# Altium PCB CurlingStonePCB.PcbDoc
Units mm, origin at the board's own origin, x right, y up, seen from the top; angles counter-clockwise.
Board outline 85 x 85 mm, 4 copper layers (Top Layer, Mid Layer 1, Mid Layer 2, Bottom Layer), stack 1.583 mm thick; 57 components, 76 nets, 239 pads, 232 vias.
Unrouted connection lines stored in the file: 1.
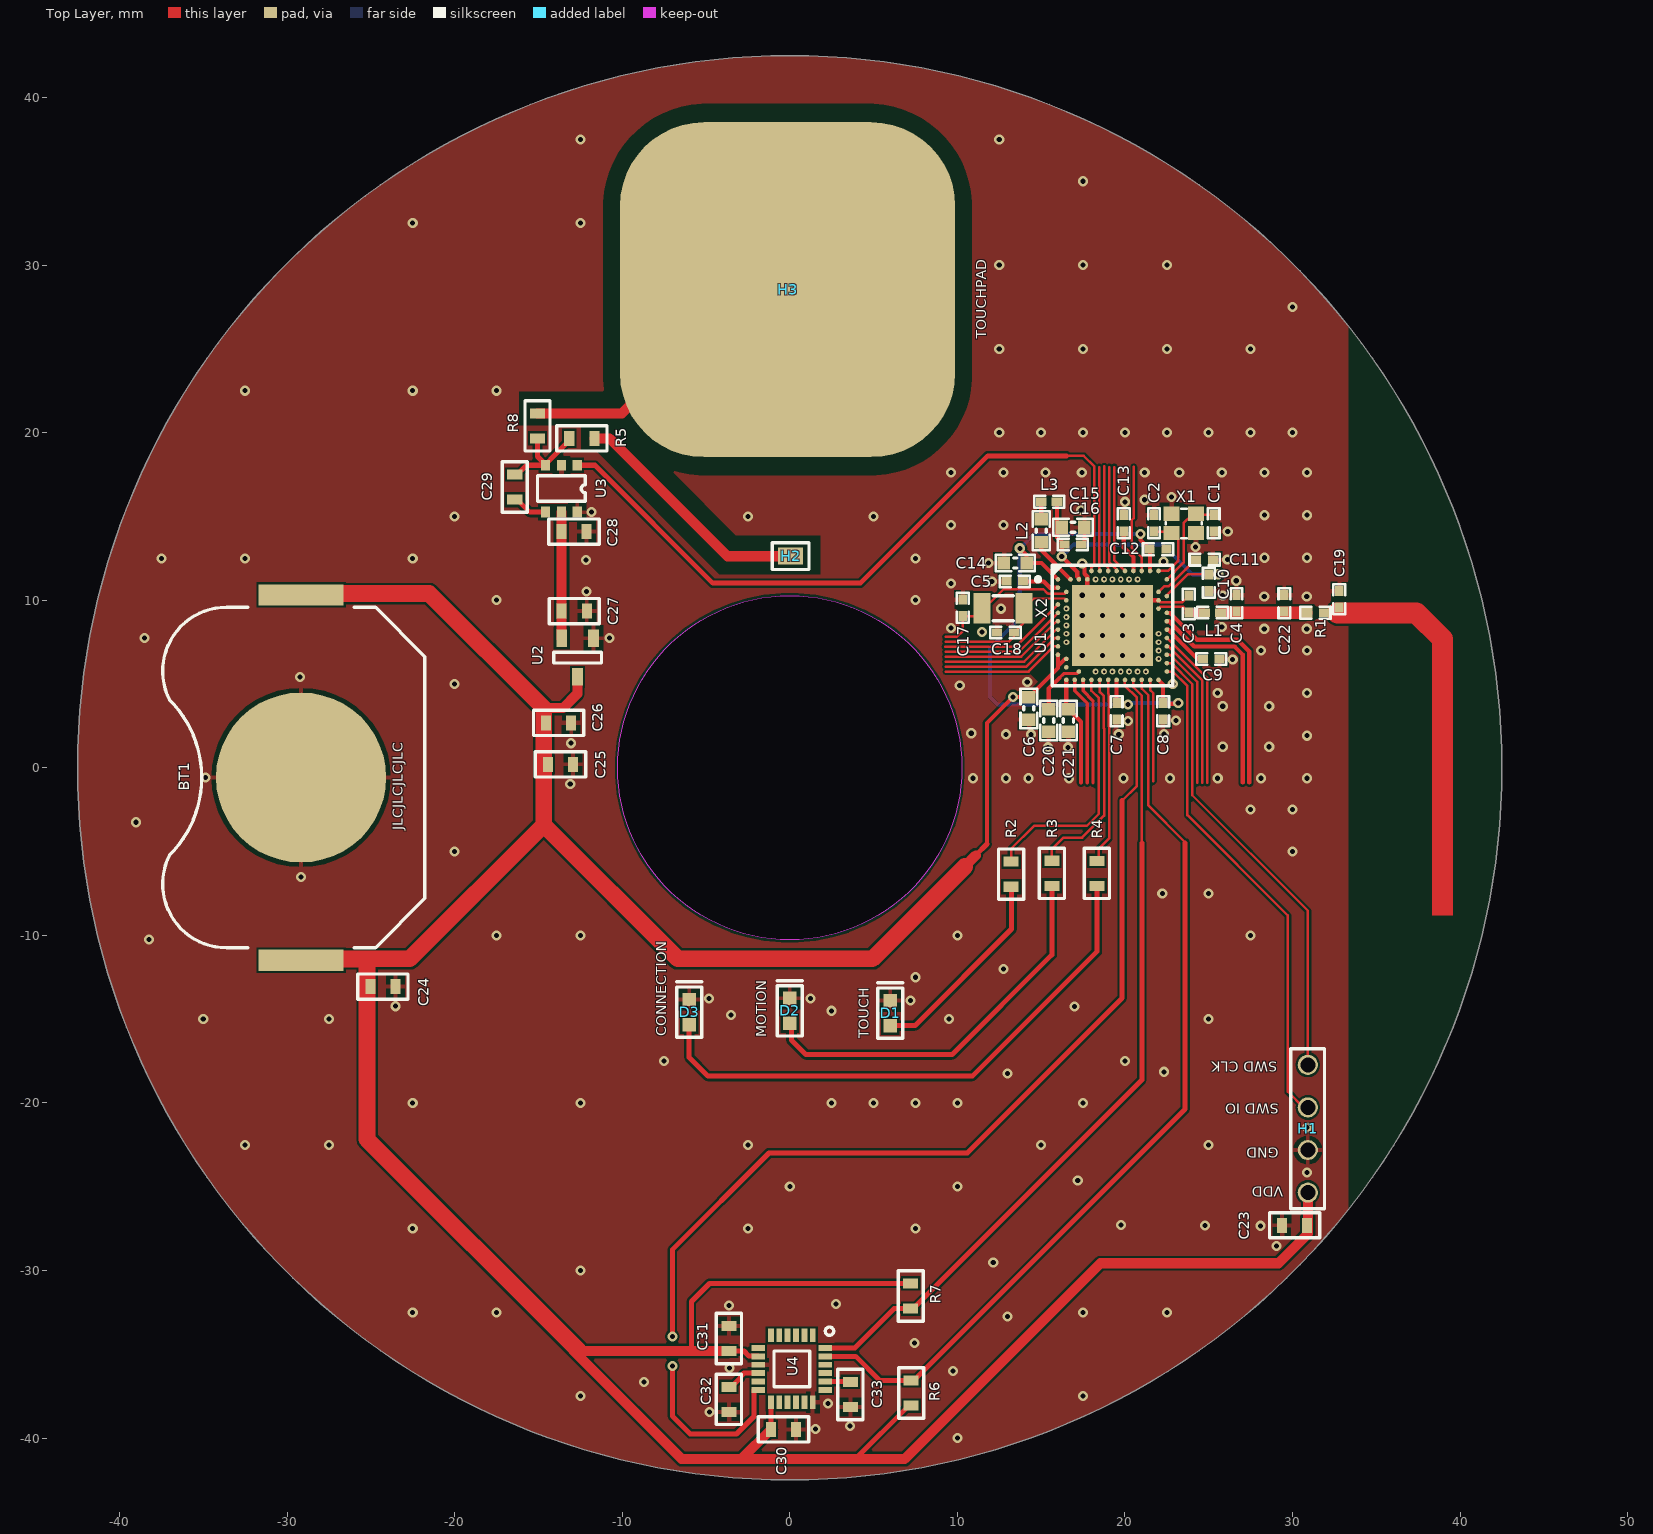
[diagram p0: Top Layer view]
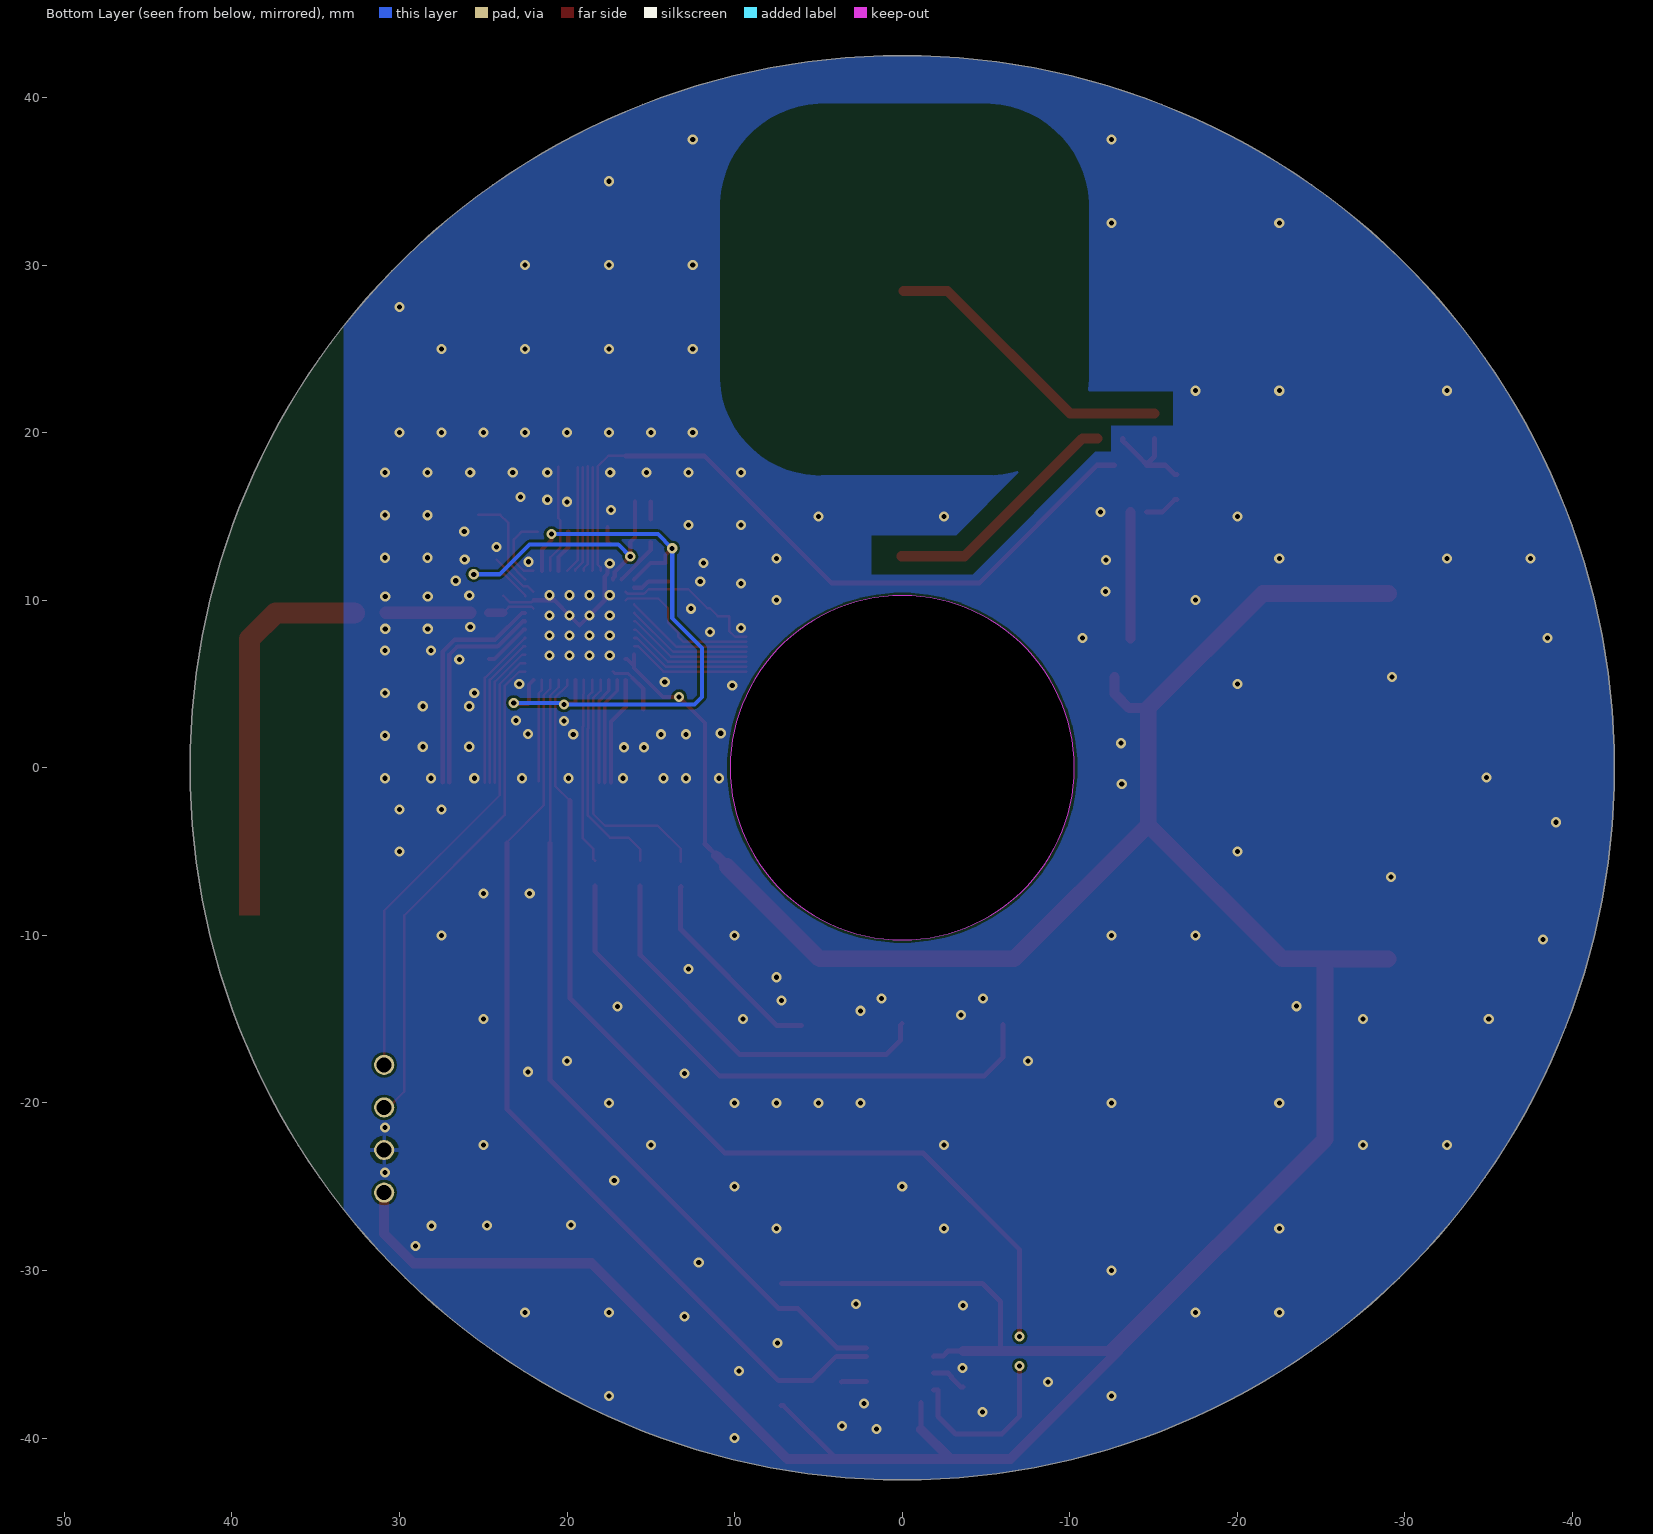
[diagram p1: Bottom Layer view, seen from below]
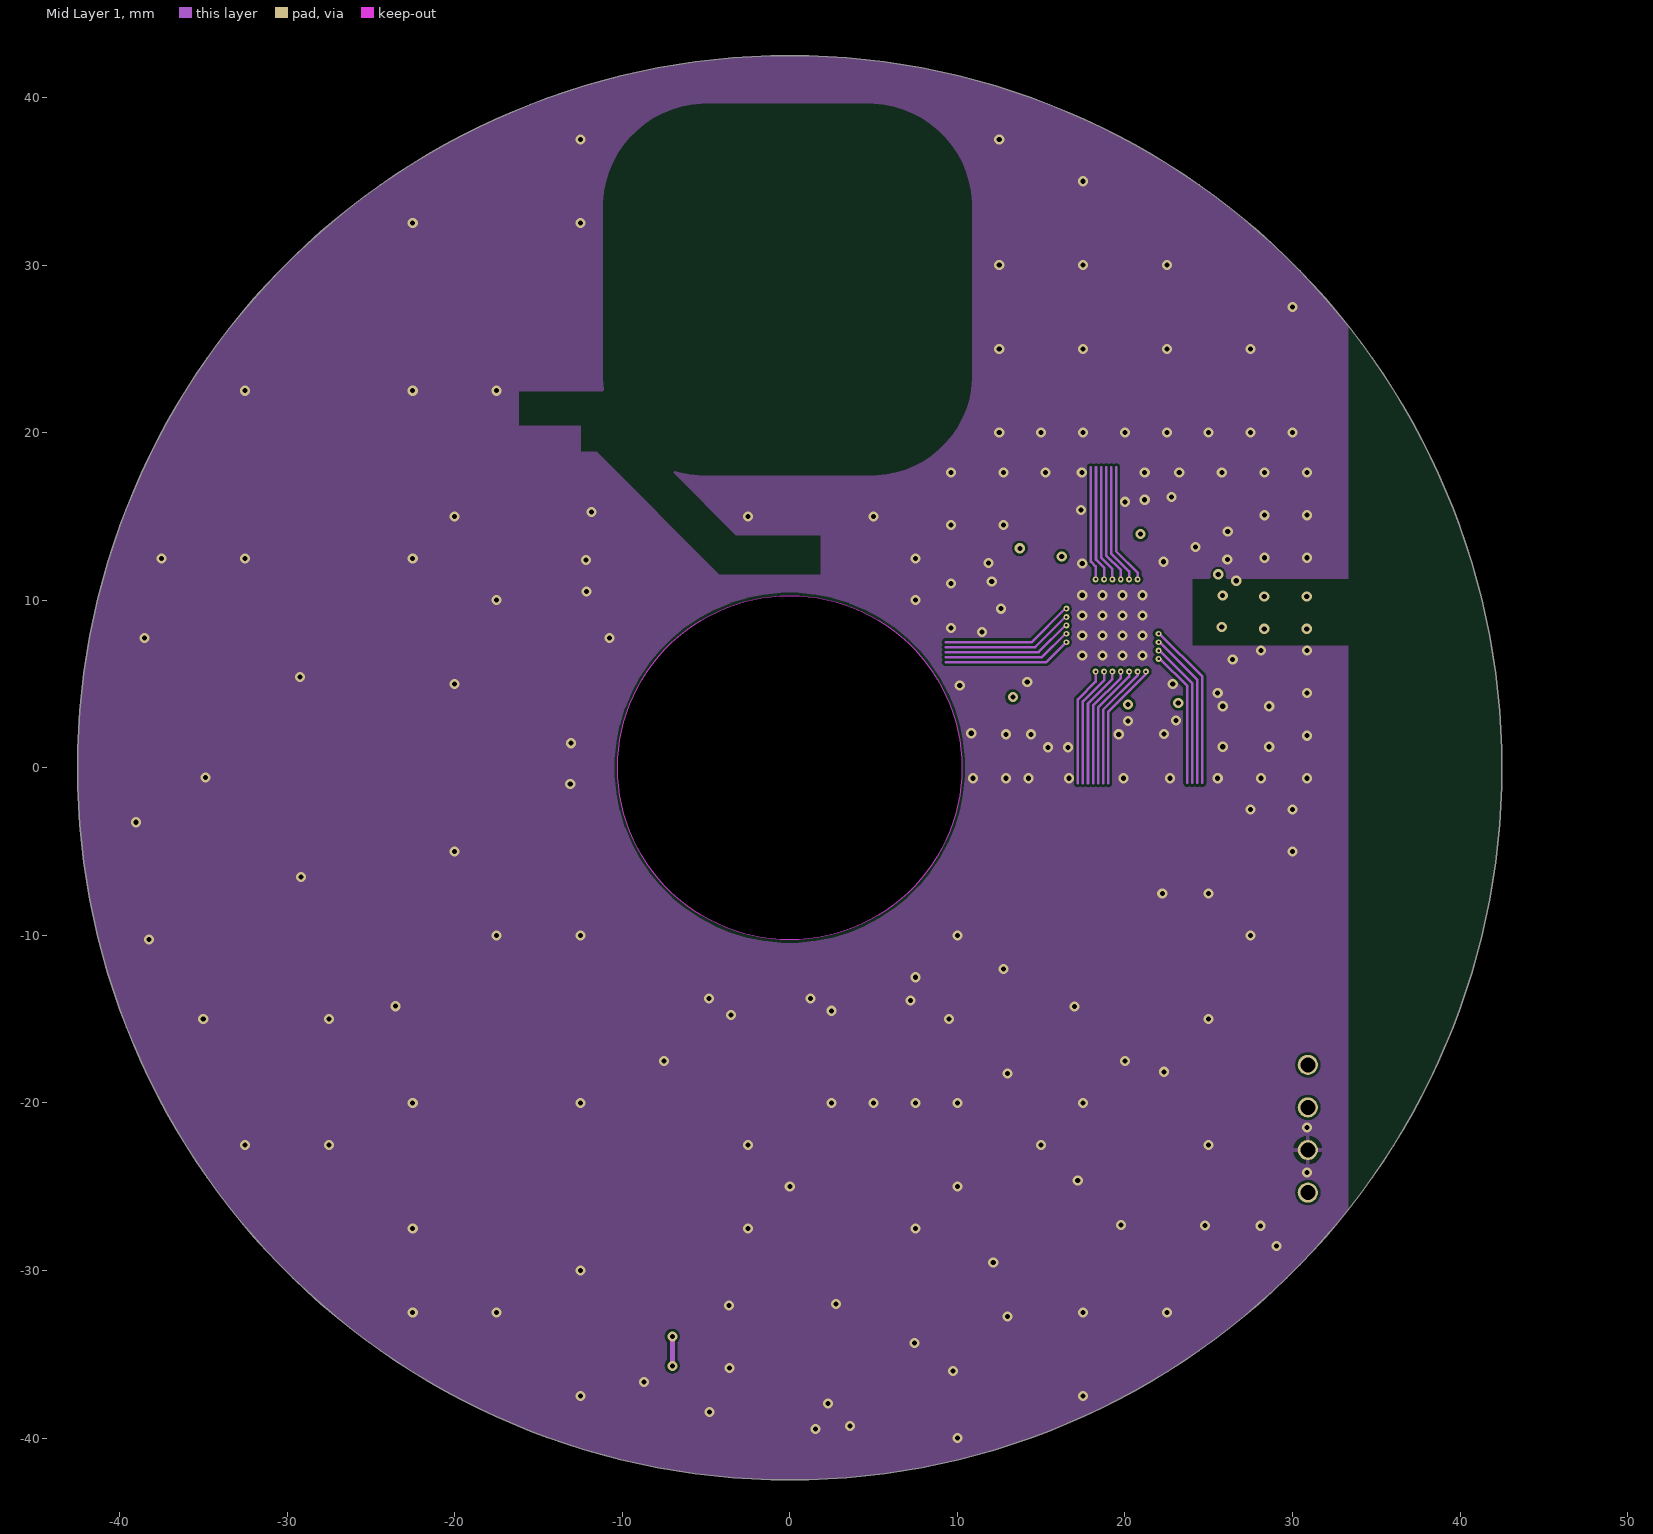
[diagram p2: Mid Layer 1]
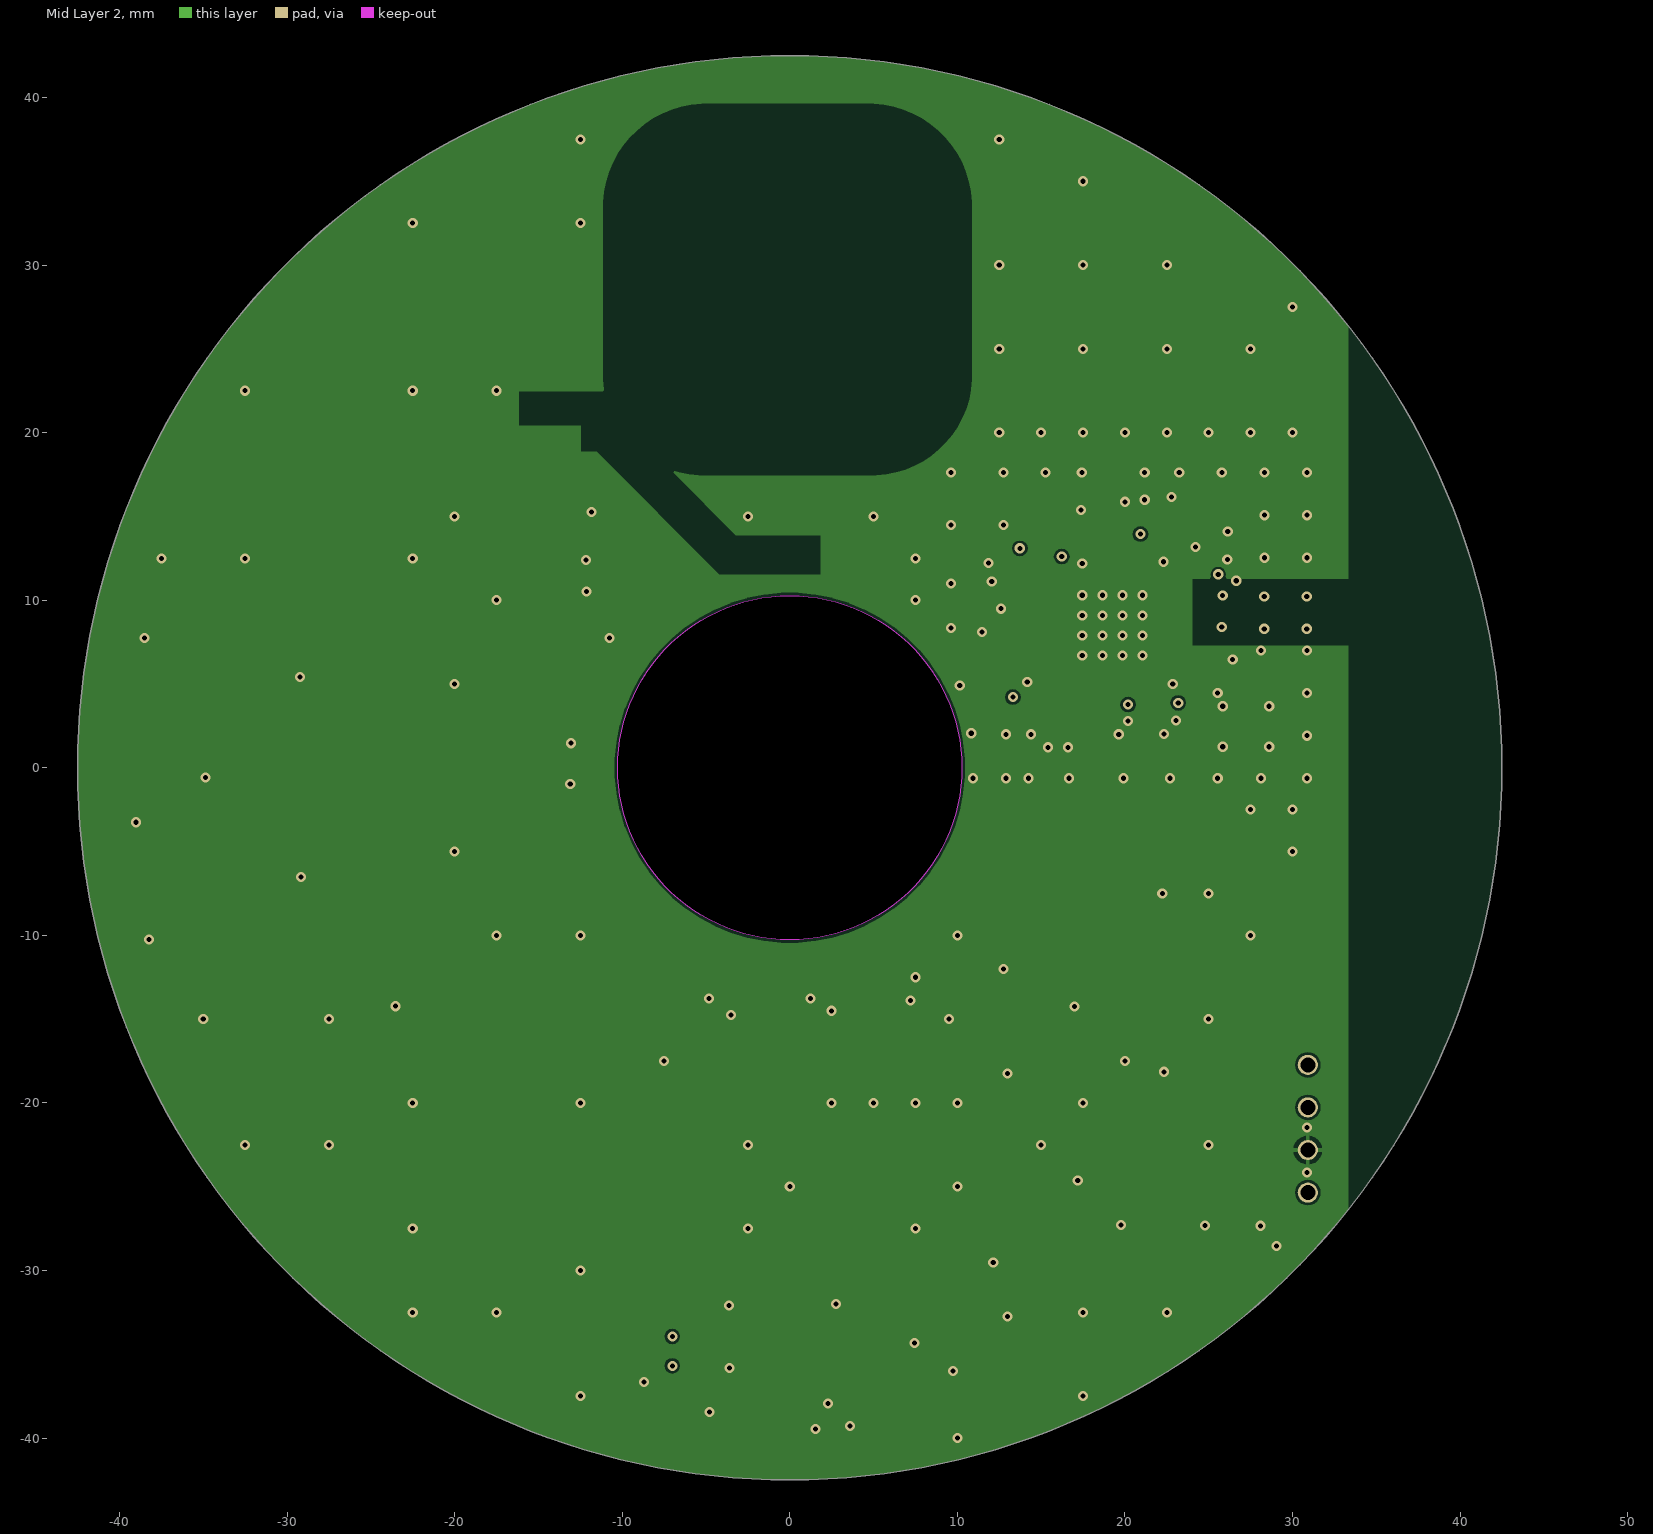
[diagram p3: Mid Layer 2]
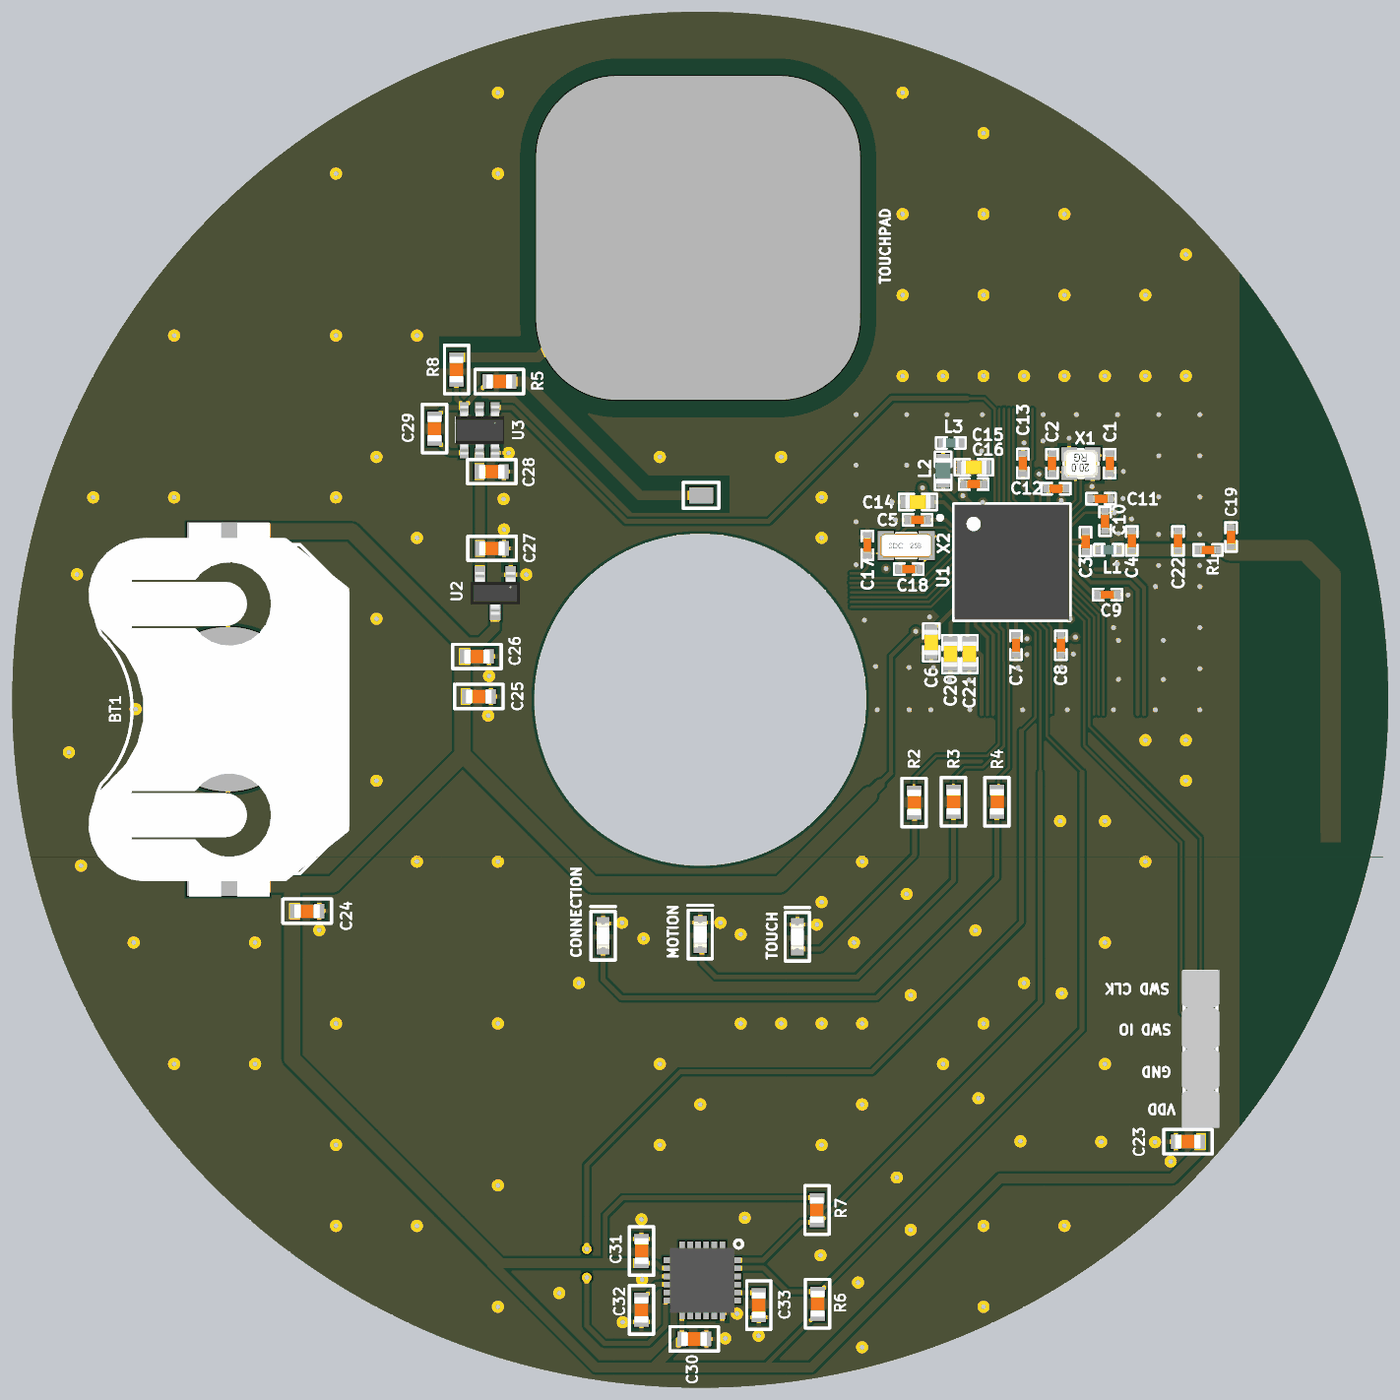
[diagram p4: 3D render of the assembled board from above, using the file's embedded part models]

## Layer stack, top to bottom
Top Solder: solder mask 0.0102, Solder Resist, Dk 3.5
Top Layer: signal copper 0.0356
Dielectric1: core 0.07, FR-4, Dk 4.8
Mid Layer 1: signal copper 0.036
Dielectric 3: prepreg 1.3, Dk 4.2
Mid Layer 2: signal copper 0.036
Dielectric 2: core 0.07, Dk 4.2
Bottom Layer: signal copper 0.0356
Bottom Solder: solder mask 0.0102, Solder Resist, Dk 3.5

## Board outline
0,-42.5 cw(c0,0) -42.5,0 cw(c0,0) 0,42.5 cw(c0,0) 42.5,0 cw(c0,0)
cut-out: 0,-10.269 cw(c0,0) -10.269,0 cw(c0,0) 0,10.269 cw(c0,0) 10.269,0 cw(c0,0)

## Design rules (kind name [scope] priority, off if disabled: settings)
Clearance Polygon_ANT [(InNamedPolygon('Top_Layer-GND')) or  (InNamedPolygon('Mid_Layer_1-GND')) or (InNamedPolygon('Mid_Layer_2-GND')) or (InNamedPolygon('Bottom_Layer-GND')) vs InNet('RF')] p1: gap=0.254 ignorepadtopadclearanceinfootprint=FALSE
Clearance Polygon [(InNamedPolygon('Top_Layer-GND')) or  (InNamedPolygon('Mid_Layer_1-GND')) or (InNamedPolygon('Mid_Layer_2-GND')) or (InNamedPolygon('Bottom_Layer-GND'))] p2: gap=0.254 ignorepadtopadclearanceinfootprint=FALSE except(0: Arc-Hole Track-Hole SMDPad-Hole THPad-Hole Via-Hole Fill-Hole Poly-Hole Region-Hole Text-Hole)
Clearance Clearance_Top [OnLayer('Top Layer')] p3: gap=0.145 ignorepadtopadclearanceinfootprint=FALSE except(0: Arc-Hole Track-Hole SMDPad-Hole THPad-Hole Via-Hole Fill-Hole Poly-Hole Region-Hole Text-Hole)
Clearance [All] p4: gap=0.15 ignorepadtopadclearanceinfootprint=FALSE
ComponentClearance [All] p1 off: gap=0.254 collisioncheckmode=3 verticalgap=0.254 showdistances=FALSE
FabricationTestPointUsage TestPointUsage [All] p1: valid=0 allowmultiple=FALSE
FabricationTestpoint Testpoint [All] p1: side=3 testpointundercomponent=TRUE minsize=1.016 maxsize=2.54 preferedsize=1.524 minholesize=0 maxholesize=1.016 preferedholesize=0.813 testpointgrid=0.025 allowsidetop=TRUE allowsidebottom=TRUE usegrid=TRUE gridtolerance=0
Height [All] p1 off: minheight=0 maxheight=25.4 prefheight=12.7
HoleSize [All] p1: absolutevalues=TRUE maxlimit=4.064 minlimit=0.1 maxpercent=80.000 minpercent=20.000
MinimumAnnularRing [All] p1 off: minimumring=0.152
PolygonConnect PolygonConnect_1 [isVia and innet(gnd)] p1: connectstyle=Direct reliefconductorwidth=0.254 reliefentries=4 polygonreliefangle="90 Angle" airgapwidth=0.254
PolygonConnect [All] p2: connectstyle=Relief reliefconductorwidth=0.254 reliefentries=4 polygonreliefangle="90 Angle" airgapwidth=0.254
RoutingVias [All] p1: holewidth=0.305 width=0.61 viastyle="Through Hole" minholewidth=0.1 minwidth=0.3 maxholewidth=0.305 maxwidth=0.61
SilkToSolderMaskClearance SilkscreenOverComponentPads [IsPad] p1: minsilkscreentomaskgap=0.254 clearancetoexposedcopper=TRUE
SolderMaskExpansion [All] p1: expansion=0.076 istentingtop=FALSE
Width [All] p1: maxlimit=2 minlimit=0.145 preferedwidth=0.15 minimp=50.000000 maximp=50.000000 favimp=50.000000
24 further rules are at their usual default settings.

## Classes and differential pairs
component class CurlingStoneSchematic: BT1 C24 C26 C28 C31 C33 D1 D2 D3 H1 H2 H3 R2 R3 R4 R5 R6 R7 R8 U2 U3 U4
component class nrf52840_qiaa: C1 C2 C3 C4 C5 C6 C7 C8 C9 C10 C11 C12 C13 C14 C15 C16 C17 C18 C19 C20 C21 C22 L1 L2 L3 R1 U1 X1 X2

## Components (designator, comment, footprint, x,y, rotation, side; value= is the part's Value field where it differs from the comment)
BT1 "Battery Holder" "Battery Holder" -29.165,-0.581 r90 top
C1 "12pF" CAPC1005X04L 25.293,14.59 r270 top
C2 "12pF" CAPC1005X04L 21.737,14.59 r90 top
C3 "0.8pF" CAPC1005X04L 23.805,9.77 r270 top
C4 "0.5pF" CAPC1005X04L 26.66,9.815 r270 top
C5 "100nF" CAPC1005X04L 13.428,11.119 r180 top
C6 "4.7µF" CAPC1608X06L 14.268,3.544 r270 top
C7 "100nF" CAPC1005X04L 19.503,3.369 r270 top
C8 "100nF" CAPC1005X04L 22.278,3.369 r270 top
C9 "820pF" CAPC1005X04L 25.153,6.494 r0 top
C10 "N.C." CAPC1005X04L 25.009,11.034 r90 top
C11 "100pF" CAPC1005X04L 24.753,12.419 r0 top
C12 "100nF" CAPC1005X04L 21.978,13.044 r0 top
C13 "N.C." CAPC1005X04L 19.928,14.594 r90 top
C14 "1.0µF" CAPC1608X06L 13.453,12.219 r180 top
C15 "1.0µF" CAPC1608X06L 16.903,14.358 r180 top
C16 "47nF" CAPC1005X04L 16.891,13.32 r0 top
C17 "12pF" CAPC1005X04L 10.326,9.544 r90 top
C18 "12pF" CAPC1005X04L 12.876,8.069 r180 top
C19 "0603 Capacitor" RF_0603 32.788,10.053 r270 top
C20 "4.7µF" CAPC1608X06L 15.453,2.819 r270 top
C21 "4.7µF" CAPC1608X06L 16.628,2.819 r270 top
C22 "N.C." CAPC1005X04L 29.512,9.815 r90 top
C23 "0603 Capacitor" 0603 30.124,-27.305 r0 top
C24 "0603 Capacitor" 0603 -24.282,-13.056 r180 top
C25 "0603 Capacitor" 0603 -13.679,0.203 r180 top
C26 "0603 Capacitor" 0603 -13.792,2.673 r180 top
C27 "0603 Capacitor" 0603 -12.86,9.353 r180 top
C28 "0603 Capacitor" 0603 -12.88,14.097 r180 top
C29 "0603 Capacitor" 0603 -16.41,16.753 r90 top
C30 "0603 Capacitor" 0603 -0.375,-39.482 r180 top
C31 "0603 Capacitor" 0603 -3.63,-34.055 r270 top
C32 "0603 Capacitor" 0603 -3.63,-37.691 r90 top
C33 "0603 Capacitor" 0603 3.62,-37.399 r90 top
D1 "0603 LED" "0603 LED" 6,-14.641 r90 top
D2 "0603 LED" "0603 LED" 0,-14.503 r90 top
D3 "0603 LED" "0603 LED" -6,-14.58 r90 top
H1 "4x1 Header" "4x1 HEADER TH" 30.912,-25.349 r90 top
H2 "Electrode" "ELECTRODE EXTERNAL" 0.051,12.631 r90 top
H3 "Electrode" "ELECTRODE INTERNAL" -0.08,28.453 r0 top
L1 "4.7nH" INDC1005X04L 25.227,9.262 r0 top
L2 "10µH" INDC1608X06L 15.003,14.144 r270 top
L3 "15nH" INDC1005X04L 15.478,15.869 r180 top
R1 "0603 Resistor" RF_0603 31.368,9.253 r0 top
R2 "0603 Resistor" 0603 13.208,-6.35 r270 top
R3 "0603 Resistor" 0603 15.642,-6.299 r270 top
R4 "0603 Resistor" 0603 18.325,-6.302 r270 top
R5 "0603 Resistor" 0603 -12.41,19.653 r0 top
R6 "0603 Resistor" 0603 7.246,-37.313 r270 top
R7 "0603 Resistor" 0603 7.214,-31.521 r90 top
R8 "0603 Resistor" 0603 -15.054,20.403 r90 top
U1 "nRF52840-QIAA" AQFN50P700X700X85_HS-74N 19.253,8.494 r0 top locked
U2 "MCP1700 1V8" "MCP1700 SOT-23" -11.71,7.728 r270 top
U3 "Capacative Touch" "CAPACATIVE TOUCH" -12.679,18.053 r270 top
U4 "MPU-6050" MPU-6050 1.37,-33.87 r270 top
X1 "32MHz" BT-XTAL_2016 23.515,14.59 r180 top
X2 "32.768kHz" XTAL_3215 12.726,9.519 r0 top

## Footprints (in the part's own frame and the unit in brackets; to place one, negate y for a bottom-side part, rotate by r counter-clockwise, add the part's x,y. Pads: shape width x height; smd on the part's side, far side on the other; paste and mask are expansions set on the pad)
"4x1 HEADER TH" [mm]
  round 1.2 hole 0.9: 1(0,0) 2(2.54,0) 3(5.08,0) 4(7.62,0)
  silkscreen extent -0.98,-1 8.57,1.02, body extent -1.1,-1.17 8.65,1.17, height 10.38
0603 [mm]
  rect 0.6x0.9 smd: 1(-0.75,0) 2(0.75,0)
  silkscreen extent -1.5,-0.75 1.5,0.75, body extent -0.8,-0.42 0.8,0.45, height 0.81
"0603 LED" [mm]
  rect 0.8x0.8 smd: 1(-0.75,0) 2(0.75,0)
  silkscreen extent -1.5,-0.76 1.8,0.76, body extent -0.8,-0.4 0.8,0.4, height 0.56
AQFN50P700X700X85_HS-74N [mm] "AQFN, 73-Leads, Body 7.00x7.00mm, Pitch 0.50mm, Thermal Pad 4.95x4.95mm, IPC Medium Density"
  rect 4.85x4.85 smd mask+0.05: 74(0,0)
  round 0.275 smd paste+0.012 mask+0.05: A8(-1.25,3.25) A10(-0.75,3.25) A12(-0.25,3.25) A14(0.25,3.25) A16(0.75,3.25) A18(1.25,3.25) A20(1.75,3.25) A22(2.25,3.25) A23(2.75,3.25) AA24(3.25,-2.25) AB2(-2.75,-2.5) AC5(-2,-2.75) AC9(-1,-2.75) AC11(-0.5,-2.75) AC13(0,-2.75) AC15(0.5,-2.75) AC17(1,-2.75) AC19(1.5,-2.75) AC21(2,-2.75) AC24(3.25,-2.75) AD2(-2.75,-3.25) AD4(-2.25,-3.25) AD6(-1.75,-3.25) AD8(-1.25,-3.25) AD10(-0.75,-3.25) AD12(-0.25,-3.25) AD14(0.25,-3.25) AD16(0.75,-3.25) AD18(1.25,-3.25) AD20(1.75,-3.25) AD22(2.25,-3.25) AD23(2.75,-3.25) B1(-3.25,2.75) B3(-2.5,2.75) B5(-2,2.75) B7(-1.5,2.75) B9(-1,2.75) B11(-0.5,2.75) B13(0,2.75) B15(0.5,2.75) B17(1,2.75) B19(1.5,2.75) B24(3.25,2.75) C1(-3.25,2.25) D2(-2.75,2) D23(2.75,2) E24(3.25,1.75) F2(-2.75,1.5) F23(2.75,1.5) G1(-3.25,1.25) H2(-2.75,1) H23(2.75,1) J1(-3.25,0.75) J24(3.25,0.75) K2(-2.75,0.5) L1(-3.25,0.25) L24(3.25,0.25) M2(-2.75,0) N1(-3.25,-0.25) N24(3.25,-0.25) P2(-2.75,-0.5) P23(2.75,-0.5) R1(-3.25,-0.75) R24(3.25,-0.75) T2(-2.75,-1) T23(2.75,-1) U1(-3.25,-1.25) U24(3.25,-1.25) V23(2.75,-1.5) W1(-3.25,-1.75) W24(3.25,-1.75) Y2(-2.75,-2) Y23(2.75,-2)
  silkscreen extent -4.56,-3.6 3.6,3.6, body extent -3.55,-3.55 3.55,3.55, height 0.85
"Battery Holder" [mil]
  rect 50x200 smd: 1(-429,0) 1(429,0)
  round 400 smd: 2(0,0)
  silkscreen extent -400,-291 400,325, body extent -456,-294 454,340, height 161
BT-XTAL_2016 [mm] "Crystal 2.0 x 1.6 mm"
  rect 0.95x0.85 smd: 1(-0.725,-0.575) 2(0.725,-0.575) 3(0.725,0.575) 4(-0.725,0.575)
  silkscreen extent -1.08,-0.88 1.08,0.88, body extent -1.05,-0.85 1.05,0.85, height 0.56
"CAPACATIVE TOUCH" [mm]
  rect 0.65x0.55 smd: 1(0,0) 2(0,-0.95) 3(0,-1.9) 4(2.8,-1.9) 5(2.8,-0.95) 6(2.8,0)
  silkscreen extent 0.63,-2.38 2.15,0.48, body extent -0.1,-2.45 2.9,0.55, height 1.48
CAPC1005X04L [mm] "Chip Capacitor, 2-Leads, Body 1.0x0.5mm, IPC High Density"
  rect 0.6x0.5 smd: 1(-0.5,0) 2(0.5,0)
  silkscreen extent -0.9,-0.35 0.9,0.35, body extent -0.51,-0.25 0.51,0.25, height 0.5
CAPC1608X06L [mm] "Chip Capacitor, 2-Leads, Body 1.6x0.8mm, IPC High Density"
  rect 0.75x0.8 smd: 1(-0.675,0) 2(0.675,0)
  silkscreen extent -1.17,-0.5 1.17,0.5, body extent -0.8,-0.43 0.8,0.43, height 0.8
"ELECTRODE EXTERNAL" [mm]
  rect 1x1.5 smd: 1(0,0)
  silkscreen extent -0.8,-1.1 0.8,1.1
"ELECTRODE INTERNAL" [mm]
  rrect50% 20x20 smd: 1(-0.052,0.08)
INDC1005X04L [mm] "Chip Inductor, 2-Leads, Body 1.0x0.5mm, IPC High Density"
  rect 0.65x0.5 smd: 1(-0.475,0) 2(0.475,0)
  silkscreen extent -0.9,-0.35 0.9,0.35, body extent -0.5,-0.3 0.5,0.3, height 0.5
INDC1608X06L [mm] "Chip Inductor, 2-Leads, Body 1.6x0.8mm, IPC High Density"
  rect 0.75x0.8 smd: 1(-0.675,0) 2(0.675,0)
  silkscreen extent -1.17,-0.5 1.17,0.5, body extent -0.8,-0.48 0.8,0.48, height 0.8
"MCP1700 SOT-23" [mm]
  rect 1.05x0.65 smd: 1(0,0) 2(0,-1.9) 3(2.3,-0.95)
  silkscreen extent 0.82,-2.38 1.48,0.48, body extent -0.17,-2.47 2.47,0.58, height 1.12
MPU-6050 [mm]
  rect 0.8x0.35 smd mask+0.102: 1(0,0)
  rect 0.8x0.35 smd: 2(0,-0.5) 3(0,-1) 4(0,-1.5) 5(0,-2) 6(0,-2.5) 13(4,-2.5) 14(4,-2) 15(4,-1.5) 16(4,-1) 17(4,-0.5) 18(4,0)
  rect 0.35x0.8 smd: 7(0.75,-3.25) 8(1.25,-3.25) 9(1.75,-3.25) 10(2.25,-3.25) 11(2.75,-3.25) 12(3.25,-3.25) 19(3.25,0.75) 20(2.75,0.75) 21(2.25,0.75) 22(1.75,0.75) 23(1.25,0.75) 24(0.75,0.75)
  silkscreen extent -0.5,-2.31 3.06,1.25, body extent 0,-3.25 4,0.75, height 0.94
RF_0603 [mm]
  rect 0.6x0.5 smd: 1(-0.5,0) 2(0.5,0)
  silkscreen extent -0.9,-0.35 0.9,0.35, body extent -0.51,-0.25 0.51,0.25, height 0.5
XTAL_3215 [mm] "XTAL SMD 3.2 x 1.5 mm"
  rect 1x1.8 smd: 1(-1.25,0) 2(1.25,0)
  silkscreen extent -0.6,-0.75 0.6,0.75, body extent -1.6,-0.75 1.6,0.75, height 0.81

## Part data
BT1: "Battery Holder 1-Cell 20mm Size Tin Nickel SMT Mount T/R", Case/Package=SMD/SMT, Manufacturer 1="Keystone Electronics", Manufacturer Part Number 1=3034TR, Package Quantity=500, Supplier Part Number 1=36-3034CT-ND, Category=Uncategorized, ComponentLink1Description=https://datasheet.ciiva.com/29204/3034tr-29204080.pdf?src-supplier=Digi-Key, ComponentLink1URL=https://datasheet.ciiva.com/29204/3034tr-29204080.pdf?src-supplier=Digi-Key, ComponentLink2Description=https://datasheet.ciiva.com/41797/3034-41797079.pdf?src-supplier=Digi-Key, ComponentLink2URL=https://datasheet.ciiva.com/41797/3034-41797079.pdf?src-supplier=Digi-Key, Contact Plating=Tin, Lead Free="Lead Free", Material=Bronze, Mount="Surface Mount,PCB", Number of Batteries=1, Number of Cells=1, Packaging="Tape and Reel", Pricing 1="1=0.42000, 25=0.37760, 100=0.28630, 250=0.25592 (USD)", RoHS=Yes, Stock 1=74655, Supplier 1=Digi-Key, Termination=SMD/SMT
C1 C2 C17 C18: library part C0402-12p, "Capacitor, NP0, ±2%", Footprint Doc=0402, LatestRevisionDate=2011-05-11, Note=50V, Part Number=C0402-12p, Pin Count=2, Published=2009-05-08, Publisher="Nordic Semiconductor"
C3: library part C0402-0.8p, "Capacitor, NP0, ±10%", Footprint Doc=0402, LatestRevisionDate=2012-11-21, Note=50V, Part Number=C0402-0.8p, Pin Count=2, Published=2009-05-08, Publisher="Nordic Semiconductor"
C4: library part C0402-0.5p, "Capacitor, NP0, ±10%", Footprint Doc=0402, LatestRevisionDate=2017-02-23, Note=50V, Part Number=C0402-0.5p, Pin Count=2, Published=2009-05-08, Publisher="Nordic Semiconductor"
C5 C7 C8 C12: library part C0402-100n, "Capacitor, X7R, ±10%", Footprint Doc=0402, LatestRevisionDate=2009-11-23, Note=16V, Part Number=C0402-100n, Pin Count=2, Published=2009-05-08, Publisher="Nordic Semiconductor"
C6 C20: library part C0603-4µ7-6.3V-X7R, "Capacitor, X7R, ±10%", Footprint Doc=0603, LatestRevisionDate=2015-06-10, Note=6.3V, Part Number=C0603-4µ7-6.3V-X7R, Pin Count=2, Published=2015-06-10, Publisher="Nordic Semiconductor"
C9: library part C0402-820p, "Capacitor, NP0, ±5%", Footprint Doc=0402, LatestRevisionDate=2009-05-08, Note=50V, Part Number=C0402-820p, Pin Count=2, Published=2009-05-08, Publisher="Nordic Semiconductor"
C10 C13 C22: library part C0402-N.C., "Not mounted", Assembly="Not mounted", Footprint Doc=0402, LatestRevisionDate=2009-05-08, Part Number=C0402-N.C., Pin Count=2, Published=2009-05-08, Publisher="Nordic Semiconductor"
  C22: Note="Chip Cap"
C11: library part C0402-100p, "Capacitor, NP0, ±5%", Footprint Doc=0402, LatestRevisionDate=2009-05-08, Note=50V, Part Number=C0402-100p, Pin Count=2, Published=2009-05-08, Publisher="Nordic Semiconductor"
C14 C15: library part C0603-1µ0, "Capacitor, X7R, ±10%", Footprint Doc=0603, LatestRevisionDate=2013-06-05, Note=16V, Part Number=C0603-1µ0, Pin Count=2, Published=2009-05-08, Publisher="Nordic Semiconductor"
C16: library part C0402-47n, "Capacitor, X7R, ±10%", Footprint Doc=0402, LatestRevisionDate=2009-05-08, Note="Chip Cap 10%", Part Number=C0402-47n, Pin Count=2, Published=2009-05-08, Publisher="Nordic Semiconductor"
C21: library part C0603-4µ7-10V-X7S, "Capacitor, X7S, ±10%", Footprint Doc=0603, LatestRevisionDate=2016-08-15, Note=10V, Part Number=C0603-4µ7-10V-X7S, Pin Count=2, Published=2016-08-15, Publisher="Nordic Semiconductor"
D1 D2 D3: "LED Uni-Color Green 574nm 2-Pin Chip LED T/R", Case Code (Imperial)=0603, Case Code (Metric)=1608, Color=Green, Forward Current=30mA, Forward Voltage=2V, Lens Color=Colorless, Manufacturer 1="Vishay Lite-On", Manufacturer Part Number 1=LTST-C191KGKT, Max Operating Temperature=85°C, Max Power Dissipation=75mW, Min Operating Temperature=-55°C, Package Quantity=1, Reverse Voltage=5V, Supplier Part Number 1=160-1446-1-ND, Test Current=20mA, Case/Package=0603, Category=LEDs, ComponentLink1Description=https://datasheet.ciiva.com/2109/ltst-c191kgkt-2109973.pdf?src-supplier=Digi-Key, ComponentLink1URL=https://datasheet.ciiva.com/2109/ltst-c191kgkt-2109973.pdf?src-supplier=Digi-Key, Depth=0.8mm, Dominant Wavelength=571nm, Height=0.55mm, Illumination Color=Green, Lead Free="Lead Free", Length=1.6mm, Lens Style=Rectangular,Colorless, Lens Transparency=Clear, Luminous Intensity=35mcd, Mount="Surface Mount", Number of Elements=1, Number of LEDs=1, Number of Pins=2, Packaging="Tape and Reel", Power Dissipation=75mW, Power Rating=75mW, Pricing 1="1=0.26000, 10=0.14100, 100=0.06560, 500=0.06060, 1000=0.04747, 2000=0.04646 (USD)", Radiation Hardening=No, RoHS=Yes, RoHS Compliant=Yes, Supplier 1=Digi-Key, Viewing Angle=130°, Wavelength=574nm, Width=0.8mm
L1: library part L0402-4n7, "High frequency chip inductor ±5%", Footprint Doc=0402, LatestRevisionDate=2012-09-19, Note="High frequency chip inductor ±5%", Part Number=L0402-4n7, Pin Count=2, Published=2009-05-08, Publisher="Nordic Semiconductor"
L2: library part L0603-10µ, "Chip inductor, IDC,min = 50 mA, ±20%", Footprint Doc=0603, LatestRevisionDate=2012-09-19, Part Number=L0603-10µ, Pin Count=2, Published=2010-02-24, Publisher="Nordic Semiconductor"
L3: library part L0402-15n, "High frequency chip inductor ±10%", Footprint Doc=0402, LatestRevisionDate=2012-09-19, Part Number=L0402-15n, Pin Count=2, Published=2010-07-12, Publisher="Nordic Semiconductor"
U1: library part nRF52840-QIAAD0, "Multi-protocol Bluetooth Low Energy, IEEE 802.15.4, ANT and 2.4GHz proprietary system-on-chip", Manufacturer="Nordic Semiconductor", Footprint Doc=AQFN-73, LatestRevisionDate=2018-12-04, Manufacturer Part Number=nRF52840-QIAAD0, Part Number=nRF52840-QIAAD0, Pin Count=73, Published=2018-12-04, Publisher="Nordic Semiconductor"
U2: "V REG, LDO 250MA, SMD, SOT-23-3; Output Voltage:1.8V; Dropout voltage:0.178V; No. of Pins:3; Voltage Regulator IC Case Style:SOT-23; Operating Temperature Range:-40°C to +125°C; Case Style:SOT-23; Max Operating Temperature:125°C; Min;RoHS Compliant: Yes", Case/Package=SOT-23, Dropout Voltage=150mV, Input Bias Current=1.6uA, Manufacturer 1=Microchip, Manufacturer Part Number 1=MCP1700T-1802E/TT, Max Input Voltage=6V, Max Operating Temperature=125°C, Max Output Current=250mA, Max Output Voltage=1.8V, Max Power Dissipation=369.6mW, Min Input Voltage=2.3V, Min Operating Temperature=-40°C, Nominal Supply Current=4uA, Output Voltage Accuracy=2%, Package Quantity=3000, Supplier Part Number 1=MCP1700T1802ETTCT-ND, Accuracy=2%, Category="Voltage Regulators - Linear", ComponentLink1Description=https://datasheet.ciiva.com/14150/mcp1700-eng-tds-14150117.pdf?src-supplier=Distrelec, ComponentLink1URL=https://datasheet.ciiva.com/14150/mcp1700-eng-tds-14150117.pdf?src-supplier=Distrelec, ComponentLink2Description=https://datasheet.ciiva.com/17364/jp011779-17364282.pdf?src-supplier=Avnet+Europe, ComponentLink2URL=https://datasheet.ciiva.com/17364/jp011779-17364282.pdf?src-supplier=Avnet+Europe, ComponentLink3Description=https://datasheet.ciiva.com/2040/21826b-2040109.pdf?src-supplier=Digi-Key, ComponentLink3URL=https://datasheet.ciiva.com/2040/21826b-2040109.pdf?src-supplier=Digi-Key, ComponentLink4Description=https://datasheet.ciiva.com/8041/21826b-8041597.pdf?src-supplier=Element14, ComponentLink4URL=https://datasheet.ciiva.com/8041/21826b-8041597.pdf?src-supplier=Element14, ComponentLink5Description=https://datasheet.ciiva.com/2040/21826b-2040110.pdf?src-supplier=Digi-Key, ComponentLink5URL=https://datasheet.ciiva.com/2040/21826b-2040110.pdf?src-supplier=Digi-Key, ComponentLink6Description=https://datasheet.ciiva.com/8237/jp011779-8237326.pdf?src-supplier=Avnet, ComponentLink6URL=https://datasheet.ciiva.com/8237/jp011779-8237326.pdf?src-supplier=Avnet, ComponentLink7Description=https://datasheet.ciiva.com/16218/filehandler-aspxddocname-en011779-16218350.pdf?src-supplier=Future+Electronics, ComponentLink7URL=https://datasheet.ciiva.com/16218/filehandler-aspxddocname-en011779-16218350.pdf?src-supplier=Future+Electronics, Height=0.95mm, Lead Free="Lead Free", Length=2.9mm, Max Supply Voltage=6V, Min Output Voltage=1.8V, Min Supply Voltage=2.3V, Mount="Surface Mount", Nominal Output Voltage=1.8V, Number of Outputs=1, Number of Pins=3, Output Current=250mA, Output Type=Fixed, Output Voltage=1.8V, Packaging="Tape and Reel", Polarity=Positive, Power Dissipation=369.6mW, Pricing 1="1=0.39000, 25=0.33000, 100=0.29000 (USD)", Quiescent Current=4uA, Radiation Hardening=No, REACH SVHC="No SVHC", RoHS=Yes, RoHS Compliant=Yes, Stock 1=24907, Supplier 1=Digi-Key, Supply Current=4uA, Termination=SMD/SMT, Width=1.3mm
U3: "Capacitive Touch Screen 1Keys 6-Pin SOT-23 Tape and Reel", Case/Package=SOT-23-6, Load Capacitance=50pF, Manufacturer 1="Microchip / Atmel", Manufacturer Part Number 1=AT42QT1011-TSHR, Max Operating Temperature=85°C, Max Supply Voltage=5.5V, Min Operating Temperature=-40°C, Min Supply Voltage=1.8V, Nominal Supply Current=729uA, Operating Supply Current=378.5uA, Package Quantity=4500, Supplier Part Number 1=AT42QT1011-TSHRCT-ND, Category=Uncategorized, ComponentLink1Description=https://datasheet.ciiva.com/1165/731627-1165685.pdf?src-supplier=Element14, ComponentLink1URL=https://datasheet.ciiva.com/1165/731627-1165685.pdf?src-supplier=Element14, ComponentLink2Description=https://datasheet.ciiva.com/14094/at42qt1011-eng-tds-14094872.pdf?src-supplier=Distrelec, ComponentLink2URL=https://datasheet.ciiva.com/14094/at42qt1011-eng-tds-14094872.pdf?src-supplier=Distrelec, ComponentLink3Description=https://datasheet.ciiva.com/1403/doc8287-1403456.pdf?src-supplier=Digi-Key, ComponentLink3URL=https://datasheet.ciiva.com/1403/doc8287-1403456.pdf?src-supplier=Digi-Key, ComponentLink4Description=https://datasheet.ciiva.com/1403/doc8287-1403457.pdf?src-supplier=Digi-Key, ComponentLink4URL=https://datasheet.ciiva.com/1403/doc8287-1403457.pdf?src-supplier=Digi-Key, ComponentLink5Description=https://datasheet.ciiva.com/1403/doc8287-1403458.pdf?src-supplier=Digi-Key, ComponentLink5URL=https://datasheet.ciiva.com/1403/doc8287-1403458.pdf?src-supplier=Digi-Key, ComponentLink6Description=https://datasheet.ciiva.com/15222/getdatasheetpartid-463081-15222284.pdf?src-supplier=Verical, ComponentLink6URL=https://datasheet.ciiva.com/15222/getdatasheetpartid-463081-15222284.pdf?src-supplier=Verical, Height=1.3mm, Lead Free="Lead Free", Length=3mm, Mount="Surface Mount", Number of Channels=1, Number of Inputs=1, Number of Pins=6, Packaging="Tape and Reel", Pricing 1="1=0.61000, 25=0.56000, 100=0.50000 (USD)", REACH SVHC="No SVHC", Resolution=14b, RoHS=Yes, RoHS Compliant=Yes, Series=QTouch™, Supplier 1=Digi-Key, Supply Current=729uA, Touchscreen=Capacitive, Width=1.75mm
U4: "INVENSENSE   MPU-6050   GYRO / ACCEL, 6-AXIS, I2C, QFN-24", Case/Package=QFN, Manufacturer 1="TDK InvenSense", Max Operating Temperature=85°C, Min Operating Temperature=-40°C, Supplier Part Number 1=1428-1007-1-ND, Category="Inertial Measurement Units (IMUs)", ComponentLink1Description=https://datasheet.ciiva.com/1513/1788002-1513632.pdf?src-supplier=Element14, ComponentLink1URL=https://datasheet.ciiva.com/1513/1788002-1513632.pdf?src-supplier=Element14, ComponentLink2Description=https://datasheet.ciiva.com/22731/1788002-22731434.pdf?src-supplier=Element14, ComponentLink2URL=https://datasheet.ciiva.com/22731/1788002-22731434.pdf?src-supplier=Element14, Manufacturer Part Number 1=MPU-6050, Mount="Surface Mount", Output Type=I2C, Packaging="Tape and Reel", Pricing 1="1=7.55000, 5=6.62400, 10=5.96200, 25=5.30000, 50=4.90240, 100=4.24000, 500=3.97500, 1000=3.71000 (USD)", RoHS=Yes, RoHS Compliant=Yes, Sensor Type="Accelerometer,Gyroscope,3 Axis", Series=-, Stock 1=3318, Supplier 1=Digi-Key
X1: library part XTAL_SMD2016_32MHz_8pF_General, "XTAL SMD 2016, 32MHz, Cl=8pF, Total Tol: ±40ppm", Footprint Doc=XTAL_2016, LatestRevisionDate=2016-08-19, Part Number=XTAL_SMD2016_32MHz_8pF_General, Pin Count=4, Published=2016-08-19, Publisher="Nordic Semiconductor"
X2: library part XTAL_SMD3215_32.768kHz_9pF_General, "XTAL SMD 3215, 32.768kHz, Cl=9pF, Total Tol: ±50ppm", Footprint Doc=XTAL_3215, LatestRevisionDate=2016-08-19, Part Number=XTAL_SMD3215_32.768kHz_9pF_General, Pin Count=2, Published=2016-08-19, Publisher="Nordic Semiconductor"

## Free pads (board coordinates)
  rect 0.762x0.762 smd mask+0.076: 0(30.81,9.256)
  round 0.3 on Mech16: 1(16.503,7.494) 1(16.503,7.994) 1(16.503,8.494) 1(16.503,8.994) 1(16.503,9.494) 1(18.253,5.744) 1(18.253,11.244) 1(18.753,5.744) 1(18.753,11.244) 1(19.253,5.744) 1(19.253,11.244) 1(19.753,5.744) 1(19.753,11.244) 1(20.253,5.744) 1(20.253,11.244) 1(20.753,5.744) 1(20.753,11.244) 1(21.253,5.744) 1(22.003,6.494) 1(22.003,6.994) 1(22.003,7.494) 1(22.003,7.994)

## Via types
v1: diameter 0.6, hole 0.3, Top Layer to Bottom Layer, 119 vias
v2: diameter 0.61, hole 0.305, Top Layer to Bottom Layer, tented both sides, 91 vias
v3: diameter 0.35, hole 0.15, Top Layer to Mid Layer 1, tented top, 22 vias

## Nets (pads, with @x,y where several pads share a name; then routed paths per layer and width w, separated by ;. In a path a pad name is that pad's centre, name@x,y a point inside that pad or via, vN(x,y) a via of type N, cw(c..) or ccw(c..) an arc to the next point about the centre after c; other vN are vias at no path point)
1V8: C27.2 C28.2 U2.2 U3.5 | length 7.5
  Top Layer w0.6: U3.5 -13.629,13.566 -13.629,13.416 -13.61,13.397 C27.2 U2.2
ANT: C19.2 R1.2 | length 22.7
  Top Layer w1.27: 32.701,9.24 37.39,9.24 38.949,7.681 38.949,-8.161
"CHARGE PUMP": C33.2 U4.20 | length 1.5
  Top Layer w0.3: U4.20 2.134,-36.635 3.605,-36.635 C33.2
D+: U1.AD6 | length 6.4
  Top Layer w0.2: U1.AD6 17.503,4.594 18.093,4.004 18.093,-0.906
D-: U1.AD4 | length 6.5
  Top Layer w0.2: U1.AD4 17.003,4.594 17.748,3.849 17.748,-0.906
DEC1: C5.1 U1.C1 | length 2.2
  Top Layer w0.25: C5.1 15.153,11.119 15.528,10.744 U1.C1
DEC3: C11.1 U1.D23 | length 3
  Top Layer w0.15: U1.D23 22.009,10.494 22.334,10.819 22.603,10.819 C11.1@24.203,12.419
DEC4_6: C10.2 C15.2 C16.1 L3.1 U1.B5 U1.E24 | length 19.2
  Top Layer w0.15: U1.E24 22.503,10.302 23.746,11.544 v2(25.568,11.544)
  Top Layer w0.25: L3.1 15.953,13.744 16.228,13.469 v2(16.228,12.606) 17.153,11.681 17.153,11.421 17.253,11.321 U1.B5
  Bottom Layer w0.25: v2(16.228,12.606) 16.942,13.32 22.251,13.32 24.027,11.544 v2(25.568,11.544)
GND: BT1.2 C1.2 C2.2 C3.1 C4.1 C5.2 C6.2 C7.2 C8.2 C9.2 C10.1 C11.2 C12.2 C13.2 C14.2 C15.1 C16.2 C17.2 C18.2 C19.1 C20.2 C21.2 C22.2 C23.1 C24.1 C25.1 C26.1 C27.1 C28.1 C30.1 C31.1 C32.1 C33.1 D1.2 D2.2 D3.2 H1.2 U1.74 U1.B7 U1.F23 U2.1 U3.2 U3.6 U4.9 U4.18 X1.2 X1.4 | length 10.8
  Top Layer w0.145: U1.F23 22.108,9.889 23.425,9.889 C3.1
  Top Layer w0.25: C16.2 17.578,13.508 C15.1 ; v2@17.596,12.137 17.596,11.576 17.753,11.418 U1.B7 17.753,9.994 U1.74 v2(19.853,9.094) 20.753,9.994 U1.F23
  other v1: 10,-40 1.545,-39.45 3.605,-39.285 -4.787,-38.449 2.268,-37.925 -12.5,-37.5 17.5,-37.5 -8.712,-36.652 9.75,-36 -3.586,-35.813 7.433,-34.32 13,-32.75 -22.5,-32.5 -17.5,-32.5 17.5,-32.5 22.5,-32.5 -3.63,-32.1 2.75,-32 -12.5,-30 12.141,-29.515 29.058,-28.524 -22.5,-27.5 -2.5,-27.5 7.5,-27.5 28.092,-27.33 24.765,-27.305 19.777,-27.277 0,-25 10,-25 17.184,-24.619 30.875,-24.15 -32.5,-22.5 -27.5,-22.5 -2.5,-22.5 15,-22.5 25,-22.5 30.875,-21.475 -22.5,-20 -12.5,-20 2.5,-20 5,-20 7.5,-20 10,-20 17.5,-20 13,-18.25 22.329,-18.141 -7.5,-17.5 20,-17.5 -35,-15 -27.5,-15 9.5,-15 25,-15 -3.5,-14.75 2.5,-14.5 17,-14.25 -23.532,-14.23 7.203,-13.891 -4.827,-13.78 1.243,-13.78 7.5,-12.5 12.75,-12 -38.25,-10.25 -17.5,-10 -12.5,-10 10,-10 27.5,-10 22.228,-7.493 25,-7.5 -29.165,-6.515 -20,-5 30,-5 -39,-3.25 27.5,-2.5 30,-2.5 -13.1,-0.975 -34.875,-0.581 -13.043,1.465 -20,5 -29.225,5.424 -10.749,7.732 -38.5,7.75 -17.5,10 7.5,10 -12.129,10.516 -12.15,12.4 -37.5,12.5 -32.5,12.5 -22.5,12.5 7.5,12.5 -20,15 -2.5,15 5,15 -11.837,15.253 12.5,20 15,20 17.5,20 20,20 22.5,20 25,20 27.5,20 30,20 -32.5,22.5 -22.5,22.5 -17.5,22.5 12.5,25 17.5,25 22.5,25 27.5,25 30,27.5 12.5,30 17.5,30 22.5,30 -22.5,32.5 -12.5,32.5 17.5,35 -12.5,37.5 12.5,37.5
  other v2: 10.931,-0.624 12.903,-0.624 14.25,-0.624 16.663,-0.624 19.914,-0.624 22.682,-0.624 25.533,-0.624 28.118,-0.624 30.861,-0.624 15.403,1.219 16.603,1.219 25.84,1.255 28.607,1.255 30.861,1.916 12.896,1.994 14.396,1.994 19.63,1.994 22.329,2.019 10.83,2.057 20.184,2.794 23.053,2.819 25.84,3.668 28.607,3.668 25.533,4.456 30.861,4.456 10.143,4.918 22.853,4.994 14.168,5.116 26.428,6.469 17.453,6.694 18.653,6.694 19.853,6.694 21.053,6.694 28.118,6.996 30.861,6.996 17.453,7.894 18.653,7.894 19.853,7.894 21.053,7.894 11.476,8.094 28.312,8.293 30.852,8.293 9.627,8.342 25.778,8.394 17.453,9.094 18.653,9.094 21.053,9.094 12.601,9.494 28.312,10.219 30.852,10.219 25.832,10.272 17.453,10.294 18.653,10.294 19.853,10.294 21.053,10.294 9.627,10.994 12.053,11.119 26.645,11.161 17.453,12.194 11.853,12.219 22.303,12.294 26.111,12.431 28.321,12.533 30.861,12.533 24.203,13.169 26.137,14.108 9.627,14.494 12.753,14.494 28.321,15.073 30.861,15.073 17.374,15.378 20.003,15.869 21.177,15.994 22.784,16.165 9.627,17.613 12.753,17.613 15.253,17.613 17.428,17.613 21.177,17.613 23.241,17.613 25.781,17.613 28.321,17.613 30.861,17.613
NetC3_2: C3.2 L1.1 U1.H23 | length 2.9
  Top Layer w0.145: U1.H23 22.108,9.599 23.474,9.599 23.808,9.265 C3.2@23.813,9.26
  Top Layer w0.508: C3.2@23.808,9.265 L1.1@24.702,9.265
NetC9_1: C9.1 U1.N24 | length 2.9
  Top Layer w0.25: U1.N24 22.58,8.244 24.33,6.494 C9.1
NetC13_1: C13.1 U1.A18 | length 2.6
  Top Layer w0.25: C13.1 19.928,13.144 20.503,12.569 U1.A18
NetC20_1: C20.1 U1.AC5 | length 3.5
  Top Layer w0.184: 16.096,5.366 16.348,5.619 17.128,5.619 U1.AC5
  Top Layer w0.25: C20.1 15.453,4.724 16.096,5.366
NetC29_1: C29.1 U3.4 | length 2.1
  Top Layer w0.3: C29.1 -16.26,16.003 -15.51,15.253 U3.4
NetC29_2: C29.2 R5.1 R8.1 U3.3 | length 6
  Top Layer w0.3: C29.2 -16.26,17.503 -15.71,18.053 U3.3 U3.3@-14.579,18.103 ; R8.1 -15.054,18.578 U3.3@-14.579,18.103 ; R5.1 -13.16,19.503 -13.31,19.353 -13.346,19.353 -14.238,18.46 -14.238,18.443 U3.3@-14.579,18.103
NetD1_1: D1.1 R2.2 | length 12.2
  Top Layer w0.3: D1.1 7.469,-15.391 13.233,-9.627 13.233,-7.125 R2.2
NetD2_1: D2.1 R3.2 | length 23.5
  Top Layer w0.3: D2.1 0.103,-15.357 0.103,-16.258 0.965,-17.12 9.679,-17.12 15.642,-11.157 R3.2
NetD3_1: D3.1 R4.2 | length 33.7
  Top Layer w0.3: D3.1 -6,-17.288 -4.885,-18.403 10.893,-18.403 18.325,-10.97 R4.2
NetH2_1: H2.1 R5.2 | length 14.6
  Top Layer w0.6: R5.2 -10.749,19.653 -3.718,12.622 -2.184,12.622 0.042,12.622 H2.1
NetL2_1: L2.1 L3.2 | length 1
  Top Layer w0.25: L2.1 L3.2
NetL2_2: L2.2 U1.B3 | length 2.9
  Top Layer w0.25: L2.2 15.003,12.994 U1.B3
P0.00/XL1: C17.1 U1.D2 X2.1 | length 9
  Top Layer w0.145: C17.1 11.001,9.044 X2.1 11.628,9.519 12.761,10.652 15.137,10.652 15.387,10.402 15.396,10.402 15.408,10.389 16.398,10.389 U1.D2
  Top Layer w0.15: 9.303,7.809 9.963,7.809 10.326,8.172 C17.1
P0.01/XL2: C18.1 U1.F2 X2.2 | length 8.9
  Top Layer w0.145: C18.1 13.976,8.669 X2.2 14.556,10.099 16.398,10.099 U1.F2
  Top Layer w0.15: 9.303,7.514 13.046,7.514 13.376,7.844 C18.1
P0.02/AIN0: U1.A12 | length 6.3
  Top Layer w0.15: 18.763,17.983 18.763,12.159 19.003,11.919 U1.A12
P0.03/AIN1: U1.B13 | length 7
  Mid Layer 1 w0.15: 18.574,17.943 18.574,12.55 19.253,11.87 v3(19.253,11.244)
P0.04/AIN2: U1.J1 | length 7.7
  Top Layer w0.15: 9.303,6.924 13.678,6.924 15.998,9.244 U1.J1
P0.05/AIN3: U1.K2 | length 7.9
  Mid Layer 1 w0.15: 9.307,7.204 14.647,7.204 16.438,8.994 v3(16.503,8.994)
P0.06: U1.L1 | length 7.6
  Top Layer w0.15: 9.303,6.629 13.813,6.629 15.928,8.744 U1.L1
P0.07: U1.M2 | length 7.9
  Mid Layer 1 w0.15: 9.307,6.904 14.847,6.904 16.438,8.494 v3(16.503,8.494)
P0.08: U1.N1 | length 7.5
  Top Layer w0.15: 9.303,6.334 13.993,6.334 15.903,8.244 U1.N1
P0.11: U1.T2 | length 7.7
  Mid Layer 1 w0.15: 9.307,6.304 15.313,6.304 v3(16.503,7.494) v3@16.48,7.494
P0.12: U1.U1 | length 7.3
  Top Layer w0.15: 9.322,5.744 14.246,5.744 15.746,7.244 U1.U1
P0.13: R2.1 U1.AD8 | length 15
  Top Layer w0.15: R2.1 13.208,-4.834 14.579,-3.464 17.722,-3.464 18.443,-2.742 18.443,4.154 18.003,4.594 U1.AD8
P0.14: U1.AC9 | length 7.1
  Mid Layer 1 w0.15: 17.196,-0.929 17.196,4.085 18.253,5.143 v3(18.253,5.744)
P0.15: R3.1 U1.AD10 | length 12.9
  Top Layer w0.15: R3.1 15.642,-4.852 16.328,-4.166 17.451,-4.166 18.763,-2.853 18.763,2.331 18.738,2.356 18.738,4.277 18.503,4.512 U1.AD10
P0.16: U1.AC11 | length 7.2
  Mid Layer 1 w0.15: 17.496,-0.929 17.496,3.961 18.753,5.218 v3(18.753,5.744)
P0.17: R4.1 U1.AD12 | length 11.1
  Top Layer w0.15: R4.1 18.424,-5.453 18.424,-4.854 19.058,-4.219 19.058,2.453 19.033,2.478 19.033,4.399 19.003,4.429 U1.AD12
P0.18/RESET: U1.AC13 | length 7.3
  Mid Layer 1 w0.152: 17.797,-0.929 17.797,3.836 19.253,5.292 v3(19.253,5.744)
P0.19: U1.AC15 | length 7.4
  Mid Layer 1 w0.15: 18.099,-0.929 18.099,3.712 19.753,5.366 v3(19.753,5.744)
P0.20: U1.AD16 U4.12 | length 70.2
  Top Layer w0.15: 19.838,-1.952 20.708,-1.081 20.708,4.182 20.003,4.887 U1.AD16
  Top Layer w0.3: v1(-7.01,-35.687) -7.01,-38.684 -5.944,-39.751 -3.175,-39.751 -2.132,-38.708 -2.132,-37.321 -2.13,-37.32 -2.13,-37.145 -2.105,-37.12 U4.12 ; v1(-7.01,-33.934) -7.01,-28.753 -1.245,-22.987 10.592,-22.987 19.838,-13.741 19.838,-1.952
  Mid Layer 1 w0.3: v1(-7.01,-35.687) v1(-7.01,-33.934)
P0.21: U1.AC17 | length 7.4
  Mid Layer 1 w0.15: 18.399,-0.929 18.399,3.587 20.253,5.442 v3(20.253,5.744)
P0.22: R7.1 U1.AD18 U4.24 | length 49.6
  Top Layer w0.15: U1.AD18 20.503,4.804 21.003,4.304 21.003,-4.487 21.005,-4.488
  Top Layer w0.3: U4.24 3.886,-34.62 6.235,-32.271 R7.1 7.364,-32.271 21.005,-18.63 21.005,-4.488
P0.23: U1.AC19 | length 7.5
  Mid Layer 1 w0.15: 18.699,-0.929 18.699,3.463 20.753,5.518 v3(20.753,5.744)
P0.24: R6.1 U1.AD20 U4.23 | length 55.5
  Top Layer w0.15: U1.AD20 21.003,4.721 21.395,4.33 ; 21.396,4.33 21.396,-2.244 23.594,-4.443 23.594,-4.487
  Top Layer w0.3: U4.23 3.929,-35.12 5.371,-36.563 R6.1 7.396,-36.563 23.594,-20.364 23.594,-4.487
P0.25: U1.AC21 | length 7.6
  Mid Layer 1 w0.15: 18.999,-0.929 18.999,3.339 21.253,5.594 v3(21.253,5.744)
P0.26: U1.G1 | length 7.8
  Top Layer w0.15: 9.268,7.219 13.473,7.219 15.998,9.744 U1.G1
P0.27: U1.H2 | length 8
  Mid Layer 1 w0.15: 9.307,7.504 14.447,7.504 16.438,9.494 v3(16.503,9.494)
P0.28/AIN4: U1.B11 | length 6.9
  Mid Layer 1 w0.15: 18.274,17.943 18.274,12.425 18.753,11.946 v3(18.753,11.244)
P0.29/AIN5: U1.A10 | length 6.2
  Top Layer w0.15: 18.468,17.944 18.468,11.779 U1.A10
P0.30/AIN6: U1.B9 | length 6.8
  Mid Layer 1 w0.15: 17.974,17.943 17.974,12.301 18.253,12.021 v3(18.253,11.244)
P0.31/AIN7: U1.A8 U3.1 | length 43.5
  Top Layer w0.15: 16.503,18.618 17.538,18.618 18.173,17.983 18.173,12.124 18.003,11.954 U1.A8
  Top Layer w0.3: U3.1 -11.628,18.053 -4.589,11.014 4.211,11.014 11.815,18.618 16.503,18.618
P1.00: U1.AD22 | length 6.1
  Top Layer w0.15: U1.AD22 21.503,4.639 21.691,4.452 21.691,-0.807
P1.01: U1.Y23 | length 8.2
  Mid Layer 1 w0.15: v3(22.003,6.494) 22.103,6.494 23.724,4.873 23.724,-0.906
P1.02: U1.W24 | length 8.5
  Top Layer w0.15: U1.W24 22.688,6.744 24.314,5.118 24.314,-0.906
P1.03: U1.V23 | length 8.8
  Mid Layer 1 w0.15: v3(22.003,6.994) 22.069,6.994 24.024,5.04 24.024,-0.906
P1.04: U1.U24 | length 9.1
  Top Layer w0.15: U1.U24 22.605,7.244 24.609,5.241 24.609,-0.906
P1.05: U1.T23 | length 9.4
  Mid Layer 1 w0.15: v3(22.003,7.494) 22.069,7.494 24.324,5.24 24.324,-0.906
P1.06: U1.R24 | length 9.7
  Top Layer w0.15: U1.R24 22.522,7.744 24.904,5.363 24.904,-0.906
P1.07: U1.P23 | length 10
  Mid Layer 1 w0.15: v3(22.003,7.994) 22.069,7.994 24.624,5.44 24.624,-0.906
P1.08: U1.P2 | length 7.8
  Mid Layer 1 w0.15: 9.307,6.604 15.047,6.604 16.438,7.994 v3(16.503,7.994)
P1.09: U1.R1 | length 7.4
  Top Layer w0.15: 9.303,6.039 14.123,6.039 15.828,7.744 U1.R1
P1.10: U1.A20 | length 6.5
  Top Layer w0.15: 20.528,17.948 20.528,14.894 20.404,14.769 20.404,13.156 21.003,12.556 U1.A20
P1.11: U1.B19 | length 7.2
  Mid Layer 1 w0.15: 19.474,17.943 19.474,12.922 20.753,11.643 v3(20.753,11.244)
P1.12: U1.B17 | length 7.1
  Mid Layer 1 w0.15: 19.174,17.943 19.174,12.798 20.253,11.718 v3(20.253,11.244)
P1.13: U1.A16 | length 6.5
  Top Layer w0.15: 19.353,17.944 19.353,12.404 20.003,11.754 U1.A16
P1.14: U1.B15 | length 7.1
  Mid Layer 1 w0.15: 18.874,17.943 18.874,12.674 19.753,11.794 v3(19.753,11.244)
P1.15: U1.A14 | length 6.4
  Top Layer w0.15: 19.058,17.944 19.058,12.282 19.503,11.837 U1.A14
REGULATOR: C32.2 U4.10 | length 2.1
  Top Layer w0.3: C32.2 -3.48,-36.941 -2.942,-36.403 -2.942,-36.333 -2.73,-36.12 U4.10
RF: C4.2 C22.1 L1.2 pad.0 R1.1 | length 5
  Top Layer w0.762: L1.2@25.771,9.256 26.66,9.256 29.512,9.256 pad.0
SWDCLK: H1.4 U1.AA24 | length 27.6
  Top Layer w0.15: U1.AA24 22.771,6.244 24.019,4.996 24.019,-1.64 30.912,-8.533 H1.4
SWDIO: H1.3 U1.AC24 | length 29.9
  Top Layer w0.15: U1.AC24 22.853,5.744 23.724,4.874 23.724,-2.82 29.718,-8.814 29.718,-19.329 30.658,-20.269 H1.3
TOUCHPAD: H3.1 R8.2 | length 18
  Top Layer w0.6: R8.2 -10.005,21.153 -2.705,28.453 H3.1@-0.08,28.453
VBUS: C21.1 U1.AD2 | length 6.5
  Top Layer w0.25: U1.AD2 16.503,3.619 C21.1 17.378,2.744 17.378,-0.881
VDD_NRF: BT1.1 C6.1 C7.1 C8.1 C12.1 C14.1 C23.2 C24.2 C25.2 C26.2 C30.2 C31.2 H1.1 R6.2 R7.2 U1.A22 U1.AD14 U1.AD23 U1.B1 U1.W1 U1.Y2 U2.3 U4.8 U4.13 | length 250.2
  Top Layer w0.25: 11.773,-4.554 11.773,2.675 v2(13.318,4.219) C6.1 16.003,5.955 16.003,6.071 ; v2(13.728,13.094) 14.128,12.694 C14.1 15.028,12.219 U1.B1 ; U1.W1 16.003,6.071 ; U1.Y2 16.427,6.494 16.003,6.071 ; U1.AD14 C7.1 19.551,3.822 20.136,3.822 v2(20.184,3.775) ; v2(20.928,13.944) 20.928,13.594 C12.1 21.503,13.019 U1.A22 ; U1.AD23 22.278,4.969 C8.1 22.328,3.819 v2@23.178,3.819
  Top Layer w0.3: -5.867,-34.805 -5.867,-31.852 -4.787,-30.771 R7.2 ; C31.2 -2.73,-34.805 -2.44,-35.095 -1.905,-35.095 U4.8 ; U4.13 -1.127,-37.873 -1.127,-39.479 C30.2 ; 3.909,-41.25 7.096,-38.063 R6.2 ; 11.104,-5.223 11.773,-4.554
  Top Layer w0.6: -14.681,3.556 -13.538,3.556 -12.679,4.415 -12.679,5.409 U2.3 ; C31.2 -5.867,-34.805 -12.591,-34.805 -12.896,-34.805 -12.743,-34.958 -6.452,-41.25 -2.893,-41.25 ; C30.2 -2.893,-41.25 ; 10.442,-5.885 11.104,-5.223 ; H1.1@30.937,-25.359 30.937,-27.33 30.937,-27.794 29.165,-29.566 18.542,-29.566 6.858,-41.25 3.909,-41.25 -2.893,-41.25
  Top Layer w1: BT1.1@-29.013,10.392 -21.517,10.392 -14.681,3.556 -14.681,2.673 -14.681,2.003 -14.681,-0.076 -14.681,-2.184 -14.681,-3.404 ; BT1.1@-29.005,-11.409 -26.989,-11.409 -25.269,-11.409 -25.222,-11.455 -25.222,-13.056 -25.222,-14.23 -25.222,-22.174 -12.591,-34.805 ; -25.076,-11.401 -22.679,-11.401 -14.681,-3.404 ; 10.442,-5.885 4.926,-11.401 -6.684,-11.401 -14.681,-3.404
  Bottom Layer w0.25: v2(20.184,3.775) 12.391,3.775 11.946,4.219 11.946,7.156 13.728,8.938 v2(13.728,13.094) 14.578,13.944 v2(20.928,13.944) ; v2@20.184,3.869 v2@20.278,3.869 ; v2@20.278,3.869 v2(23.178,3.869)
XC1: C1.1 U1.B24 X1.1 | length 5.8
  Top Layer w0.15: U1.B24 23.503,12.244 23.503,14.594 23.999,15.09 C1.1
XC2: C2.1 U1.A23 X1.3 | length 4.3
  Top Layer w0.15: C2.1 22.715,14.09 X1.3 23.178,13.626 23.178,12.344 22.578,11.744 U1.A23
pads on no net: U1.AB2 U1.J24 U1.L24 U4.1 U4.2 U4.3 U4.4 U4.5 U4.6 U4.7 U4.11 U4.14 U4.15 U4.16 U4.17 U4.19 U4.21 U4.22
copper on no net: | length 26.7
  Top Layer w0.25: 22.503,8.744 22.638,8.744 24.138,7.244 26.549,7.244 27.026,6.767 27.026,-0.881 ; 22.503,9.244 22.697,9.244 24.302,7.639 26.712,7.639 27.421,6.931 27.421,-0.881

## Polygon pours and split planes (outlines as drawn)
GND on Bottom Layer "GND_L04_P003" (solid, remove dead copper, pour order 3): 0,-42.5 cw(c0,0) -42.5,0 cw(c0,0) 0,42.5 cw(c0,0) 42.5,0 cw(c0,0)
GND on Mid Layer 2 "GND_L03_P002" (solid, remove dead copper, pour order 2): 0,-42.5 cw(c0,0) -42.5,0 cw(c0,0) 0,42.5 cw(c0,0) 42.5,0 cw(c0,0)
GND on Mid Layer 1 "GND_L02_P001" (solid, remove dead copper, pour order 1): 0,-42.5 cw(c0,0) -42.5,0 cw(c0,0) 0,42.5 cw(c0,0) 42.5,0 cw(c0,0)
GND on Top Layer "GND_L01_P000" (solid, remove dead copper, pour order 0): 0,-42.5 cw(c0,0) -42.5,0 cw(c0,0) 0,42.5 cw(c0,0) 42.5,0 cw(c0,0)

## Other copper
Top Layer:
  rectangle net ANT: 38.317,-8.808 39.587,-8.046
  pour cut-out: -16.132,22.453 -16.132,20.453 -10.132,20.453 -10.132,22.453
  pour cut-out: -11.132,33.453 cw(c-4.965,33.453) -4.965,39.62 4.701,39.62 cw(c4.701,33.453) 10.868,33.453 10.868,23.453 cw(c4.868,23.452) 4.868,17.453 -5.132,17.453 cw(c-5.132,23.453) -11.132,23.453
  pour cut-out: -12.457,20.453 -12.457,18.878 -11.528,18.878 -4.195,11.544 1.818,11.544 1.818,13.858 -3.213,13.858 -9.807,20.453
  pour cut-out: 33.321,30 33.321,-30 49.21,-30 49.21,30
  region net GND: 35.844,16.032
  pour cut-out: 43.362,14.026
  pour cut-out: 22.586,8.17 25.328,8.17 25.328,10.019 24.528,10.019 24.528,11.065 22.586,11.065
  pour cut-out: 15.017,4.918 13.956,5.979 15.724,7.747 16.785,6.686
  pour cut-out: 21.827,4.507 20.766,5.568 22.534,7.335 23.594,6.275
  pour cut-out: 19.503,7.744 19.503,9.244 22.003,9.244 22.003,7.744
  pour cut-out: 13.869,3.094 13.869,4.494 16.067,4.494 16.067,3.094
Mid Layer 1:
  pour cut-out: -11.132,33.453 cw(c-4.965,33.453) -4.965,39.62 4.701,39.62 cw(c4.701,33.453) 10.868,33.453 10.868,23.453 cw(c4.868,23.452) 4.868,17.453 -5.132,17.453 cw(c-5.132,23.453) -11.132,23.453
  pour cut-out: -12.457,20.453 -12.457,18.878 -11.528,18.878 -4.195,11.544 1.818,11.544 1.818,13.858 -3.213,13.858 -9.807,20.453
  pour cut-out: -16.132,22.453 -16.132,20.453 -10.132,20.453 -10.132,22.453
  pour cut-out: 33.321,30 33.321,-30 49.21,-30 49.21,30
  pour cut-out: 34.118,7.269 24.008,7.269 24.008,11.269 34.118,11.269
Mid Layer 2:
  pour cut-out: -12.457,20.453 -12.457,18.878 -11.528,18.878 -4.195,11.544 1.818,11.544 1.818,13.858 -3.213,13.858 -9.807,20.453
  pour cut-out: -11.132,33.453 cw(c-4.965,33.453) -4.965,39.62 4.701,39.62 cw(c4.701,33.453) 10.868,33.453 10.868,23.453 cw(c4.868,23.452) 4.868,17.453 -5.132,17.453 cw(c-5.132,23.453) -11.132,23.453
  pour cut-out: 34.118,7.269 24.008,7.269 24.008,11.269 34.118,11.269
  pour cut-out: -16.132,22.453 -16.132,20.453 -10.132,20.453 -10.132,22.453
  pour cut-out: 33.321,30 33.321,-30 49.21,-30 49.21,30
Bottom Layer:
  pour cut-out: -12.457,20.453 -12.457,18.878 -11.528,18.878 -4.195,11.544 1.818,11.544 1.818,13.858 -3.213,13.858 -9.807,20.453
  pour cut-out: -11.132,33.453 cw(c-4.965,33.453) -4.965,39.62 4.701,39.62 cw(c4.701,33.453) 10.868,33.453 10.868,23.453 cw(c4.868,23.452) 4.868,17.453 -5.132,17.453 cw(c-5.132,23.453) -11.132,23.453
  pour cut-out: -16.132,22.453 -16.132,20.453 -10.132,20.453 -10.132,22.453
  pour cut-out: 33.321,30 33.321,-30 49.21,-30 49.21,30

## Silkscreen, mask and mechanical layers (free items; w line width, h text height)
Top Overlay:
  text "TOUCHPAD" at 11.718,25.603 h0.6 r90
  text "JLCJLCJLCJLC" at -23.086,-3.736 h0.6 r90
  text "CONNECTION" at -7.373,-16.03 h0.6 r90
  text "MOTION" at -1.395,-16.081 h0.6 r90
  text "TOUCH" at 4.727,-16.131 h0.6 r90
  text "SWD CLK" at 29.085,-17.549 h0.6 r180
  text "SWD IO" at 29.187,-20.064 h0.6 r180
  text "GND" at 29.187,-22.68 h0.6 r180
  text "VDD" at 29.441,-24.991 h0.6 r180
Mechanical 1:
  circle w0.198: c0,0 r42.5
  circle w0.198: c0,0 r10.269